# Altium PCB ESP_Infidel_PCB.PcbDoc
Units mm, origin at the board's own origin, x right, y up, seen from the top; angles counter-clockwise.
Board outline 50 x 20 mm, 4 copper layers (Top Layer, Layer 1, Layer 2, Bottom Layer), stack 1.561 mm thick; 47 components, 24 nets, 155 pads, 44 vias.
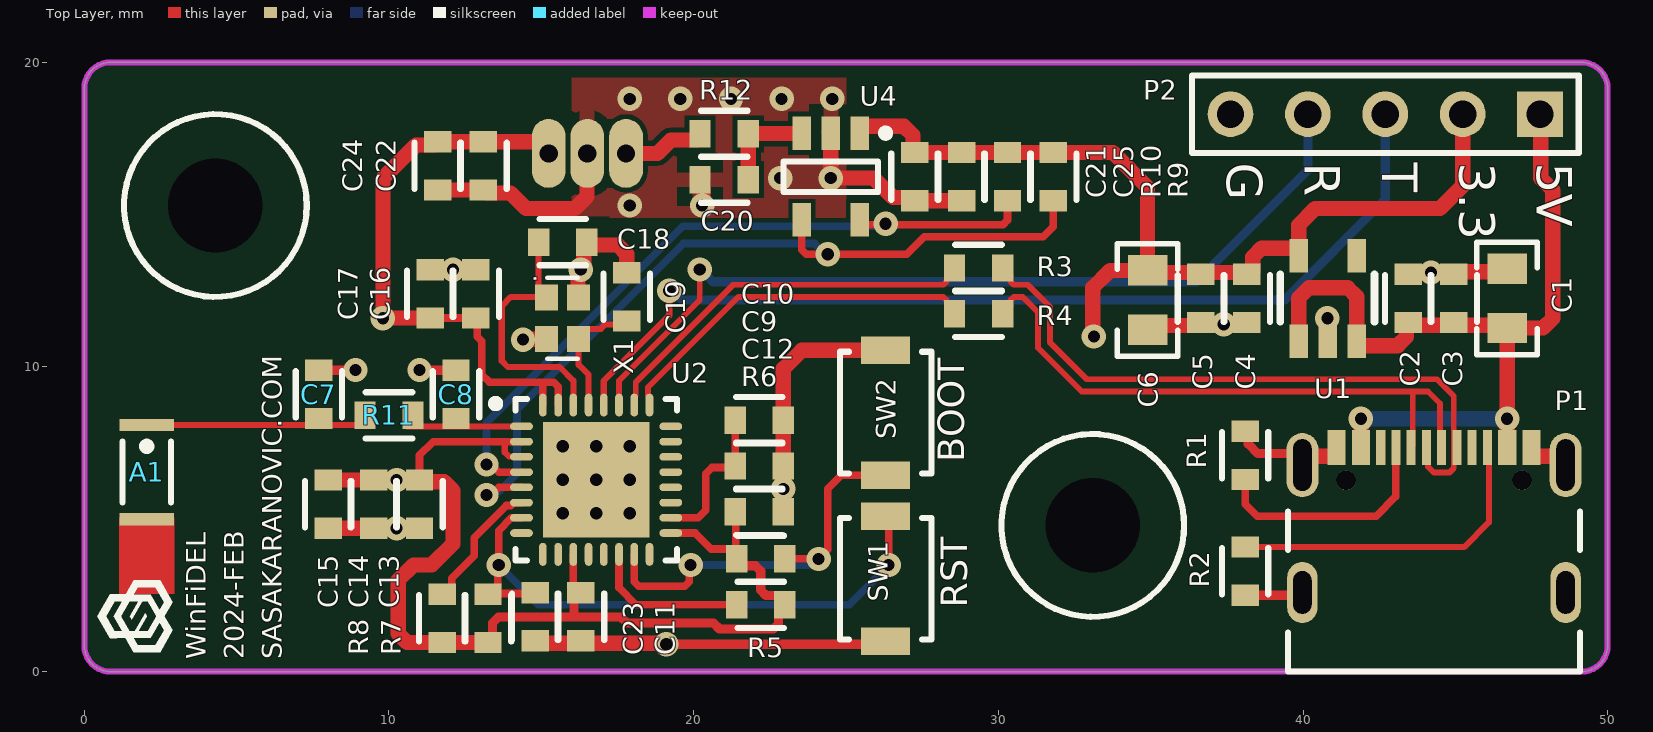
[diagram p0: Top Layer view]
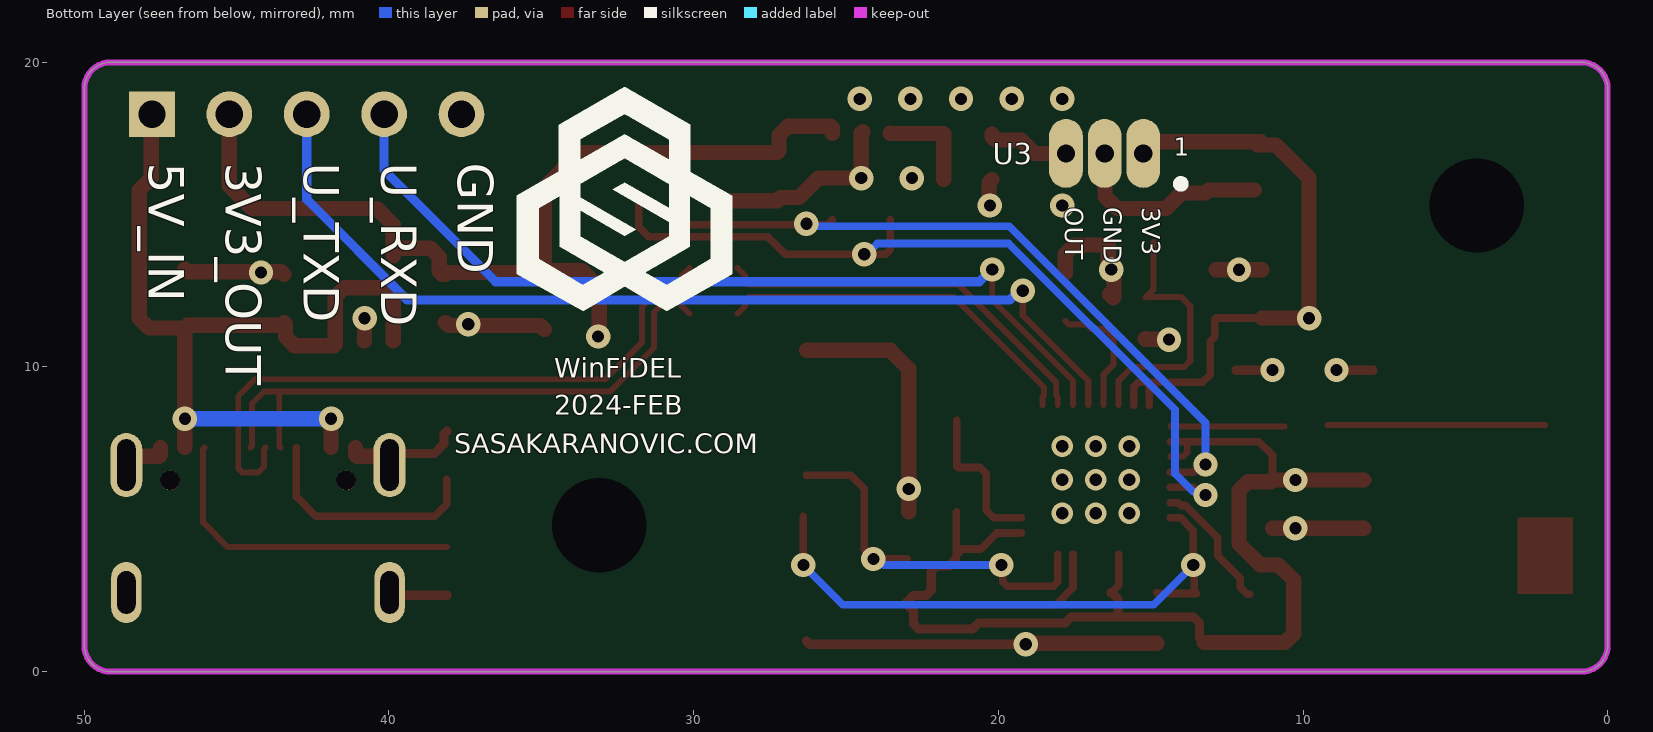
[diagram p1: Bottom Layer view, seen from below]
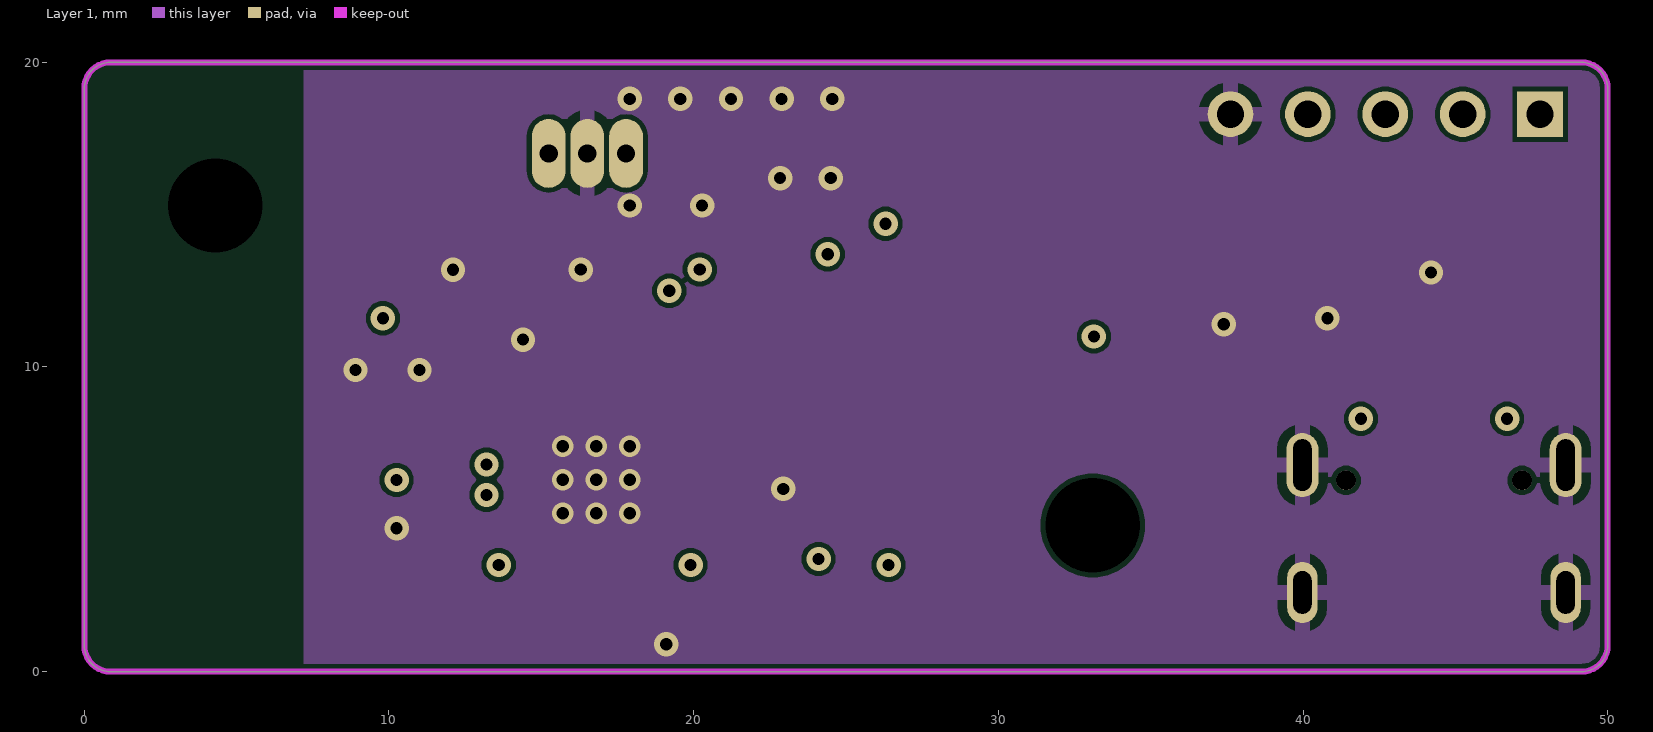
[diagram p2: Layer 1]
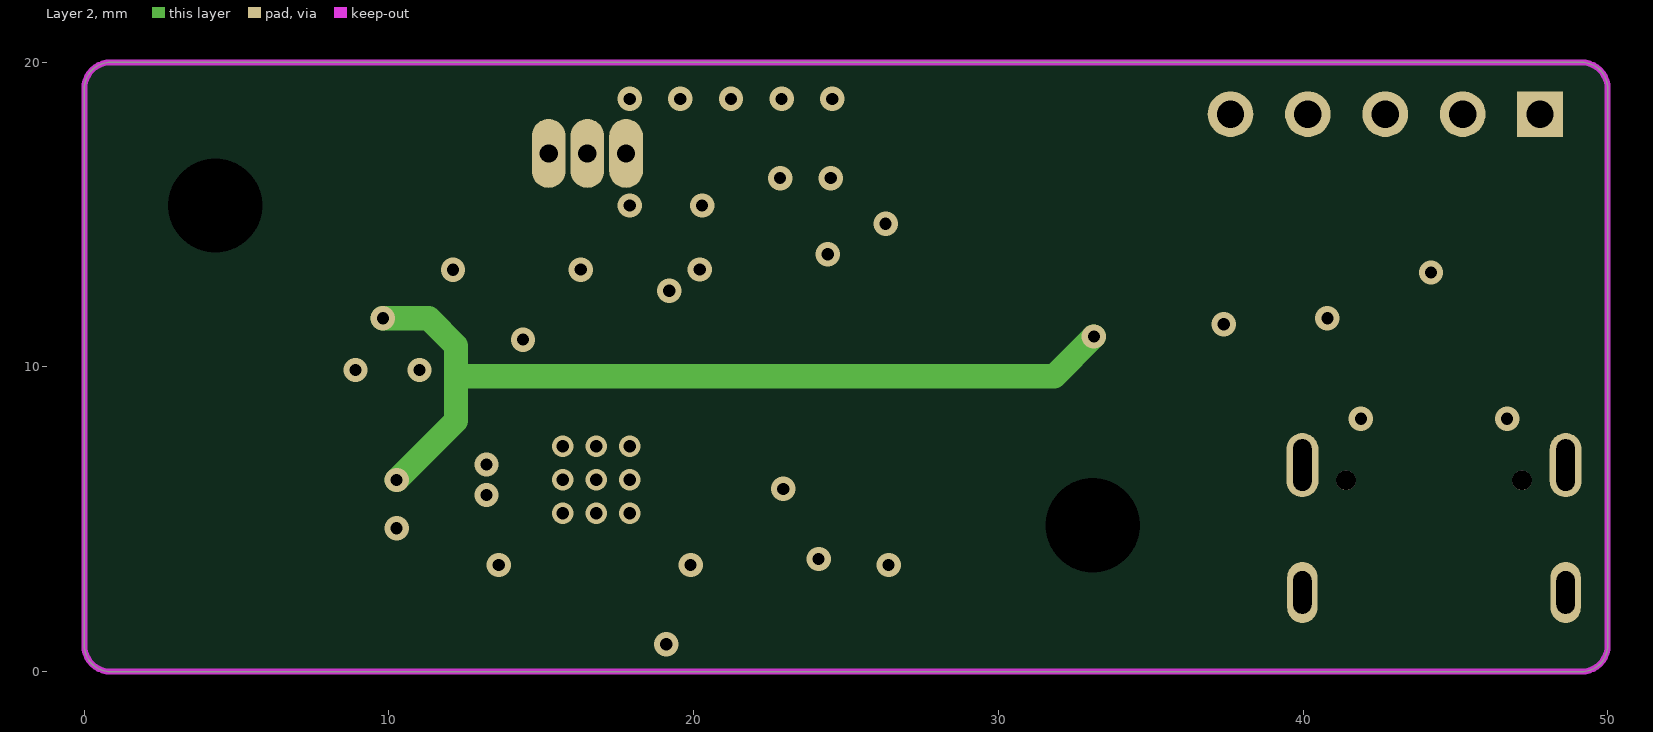
[diagram p3: Layer 2]
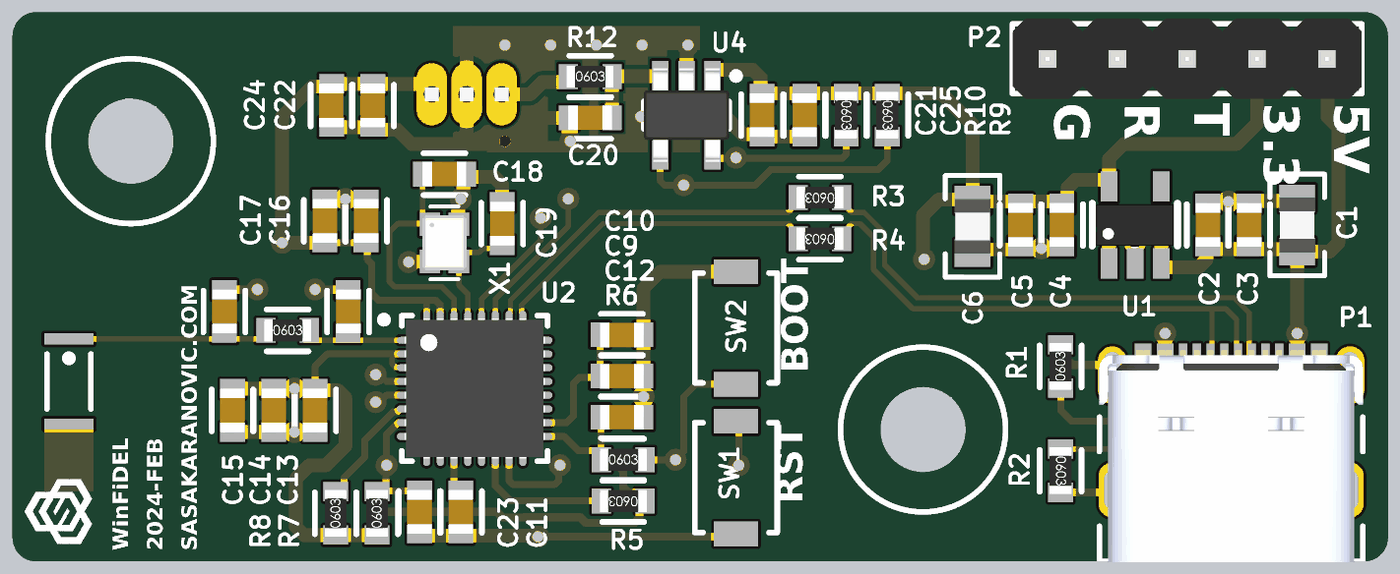
[diagram p4: 3D render of the assembled board from above, using the file's embedded part models]

## Layer stack, top to bottom
Top Solder: solder mask 0.0102, Solder Resist, Dk 3.5
Top Layer: signal copper 0.0356
Dielectric 2: prepreg 0.11, PP-006, Dk 4.1
Layer 1: signal copper 0.035
Dielectric 1: dielectric 1.2, FR-4, Dk 4.8
Layer 2: signal copper 0.035
Dielectric 3: prepreg 0.11, PP-006, Dk 4.1
Bottom Layer: signal copper 0.0356
Bottom Solder: solder mask 0.0102, Solder Resist, Dk 3.5

## Board outline
0.86,0 cw(c0.86,0.86) 0,0.86 0,19.14 cw(c0.86,19.14) 0.86,20 49.14,20 cw(c49.14,19.14) 50,19.14 50,0.86 cw(c49.14,0.86) 49.14,0

## Design rules (kind name [scope] priority, off if disabled: settings)
Clearance RF_Poly [All vs InNetClass('RF')] p1: gap=0.19 ignorepadtopadclearanceinfootprint=FALSE
Clearance [All] p2: gap=0.152 ignorepadtopadclearanceinfootprint=FALSE
DiffPairsRouting [All] p1: maxlimit=0.21 minlimit=0.127 mostfreqgap=0.21 toplayer_mingap=0.21 toplayer_minwidth=0.191 toplayer_maxwidth=0.191 toplayer_prefwidth=0.191 midlayer1_maxgap=0.127 midlayer1_prefgap=0.127 midlayer1_minwidth=0.08 midlayer1_maxwidth=0.08 midlayer1_prefwidth=0.08 midlayer2_maxgap=0.127 midlayer2_prefgap=0.127 midlayer2_minwidth=0.08 midlayer2_maxwidth=0.08 midlayer2_prefwidth=0.08 bottomlayer_mingap=0.21 bottomlayer_minwidth=0.191 bottomlayer_maxwidth=0.191 bottomlayer_prefwidth=0.191 impedanceprofiledriven=TRUE impedanceprofileid={A8B91CB2-8251-40B6-85BE-8A28E7F6A7C3} impedanceprofilevalue=90.000000 maxuncoupledlength=12.7
HoleSize [All] p1: absolutevalues=TRUE maxlimit=50 minlimit=0.4 maxpercent=80.000 minpercent=20.000
MinimumSolderMaskSliver [All] p1 off: minsoldermaskwidth=0.1
PlaneClearance RF_Clearance [InNetClass('RF')] p1: clearance=0.19
PlaneClearance [All] p2: clearance=0.508
PlaneConnect [All] p1: pad.planeconnectstyle=Relief pad.reliefexpansion=0.508 pad.reliefentries=4 pad.reliefconductorwidth=3 pad.reliefairgap=0.2 via.planeconnectstyle=Direct via.reliefexpansion=0.508 via.reliefentries=4 via.reliefconductorwidth=0.254 via.reliefairgap=0.254
PolygonConnect PolygonConnect_2 [All vs IsNamedPolygon('GND_L01_P006')] p1: connectstyle=Direct reliefconductorwidth=0.254 reliefentries=4 polygonreliefangle="90 Angle" airgapwidth=0.254
PolygonConnect PolygonConnect_1 [All vs IsNamedPolygon('12V_L01_P005')] p2: connectstyle=Direct reliefconductorwidth=0.254 reliefentries=4 polygonreliefangle="90 Angle" airgapwidth=0.254
PolygonConnect GND_POLY [All vs InNamedPolygon('GND_POLY')] p3: thpad.connectstyle=Relief thpad.reliefconductorwidth=3 thpad.reliefentries=4 thpad.polygonreliefangle="90 Angle" thpad.airgapwidth=0.2 smdpad.connectstyle=Relief smdpad.reliefconductorwidth=0.254 smdpad.reliefentries=4 smdpad.polygonreliefangle="90 Angle" smdpad.airgapwidth=0.254 via.connectstyle=Direct via.reliefconductorwidth=0.254 via.reliefentries=4 via.polygonreliefangle="90 Angle" via.airgapwidth=0.254
PolygonConnect FET_GND [All vs InNamedPolygon('FET_GND')] p4: thpad.connectstyle=Relief thpad.reliefconductorwidth=0.254 thpad.reliefentries=4 thpad.polygonreliefangle="90 Angle" thpad.airgapwidth=0.254 smdpad.connectstyle=Relief smdpad.reliefconductorwidth=0.4 smdpad.reliefentries=4 smdpad.polygonreliefangle="90 Angle" smdpad.airgapwidth=0.15 via.connectstyle=Direct via.reliefconductorwidth=0.254 via.reliefentries=4 via.polygonreliefangle="90 Angle" via.airgapwidth=0.254
PolygonConnect RF-Poly [All vs InNetClass('RF')] p5: connectstyle=Relief reliefconductorwidth=0.3 reliefentries=4 polygonreliefangle="90 Angle" airgapwidth=0.2
PolygonConnect [All] p6: thpad.connectstyle=Relief thpad.reliefconductorwidth=0.5 thpad.reliefentries=4 thpad.polygonreliefangle="90 Angle" thpad.airgapwidth=0.3 smdpad.connectstyle=Relief smdpad.reliefconductorwidth=0.5 smdpad.reliefentries=4 smdpad.polygonreliefangle="90 Angle" smdpad.airgapwidth=0.4 via.connectstyle=Direct via.reliefconductorwidth=0.254 via.reliefentries=4 via.polygonreliefangle="90 Angle" via.airgapwidth=0.254
RoutingVias [All] p1: holewidth=0.4 width=0.8 viastyle="Through Hole" minholewidth=0.3 minwidth=0.6 maxholewidth=2 maxwidth=50
SilkToSilkClearance [All] p1 off: silktosilkclearance=0.1
SilkToSolderMaskClearance [IsPad] p1 off: minsilkscreentomaskgap=0.1 clearancetoexposedcopper=TRUE
SolderMaskExpansion [All] p1: expansion=0.102 istentingtop=FALSE
Width [All] p1: maxlimit=50 minlimit=0.154 preferedwidth=0.2
23 further rules are at their usual default settings.

## Classes and differential pairs
net class RF: NetA1_1 NetC8_2
differential pair USB_IN: +USB_IN_P -USB_IN_N
differential pair USB: +USB_P -USB_N

## Components (designator, comment, footprint, x,y, rotation, side; value= is the part's Value field where it differs from the comment)
A1 "ANT3216LL00R2400A" ANT3216LL00R2400A 2.05,6.55 r270 top locked
C1 "Cap" 0805 46.7,12.25 r270 top value=22uF
C2 "Cap" "0603 - CAP" 43.45,12.25 r270 top value=10uF
C3 "Cap" "0603 - CAP" 44.95,12.25 r270 top value=100n
C4 "Cap" "0603 - CAP" 38.15,12.25 r90 top value=100n
C5 "Cap" "0603 - CAP" 36.65,12.25 r90 top value=10uF
C6 "Cap" 0805 34.9,12.2 r90 top value=22uF
C7 "Cap" "0603 - CAP" 7.7,9.1 r270 top value=DNP
C8 "Cap" "0603 - CAP" 12.2,9.1 r270 top value=DNP
C9 "Cap" "0603 - CAP" 22.15,6.75 r180 top value=1u
C10 "Cap" "0603 - CAP" 22.15,8.25 r180 top value=1u
C11 "Cap" "0603 - CAP" 16.3,1.8 r90 top value=100n
C12 "Cap" "0603 - CAP" 22.15,5.25 r180 top value=1u
C13 "Cap" "0603 - CAP" 11,5.5 r90 top value=100n
C14 "Cap" "0603 - CAP" 9.5,5.5 r90 top value=1u
C15 "Cap" "0603 - CAP" 8,5.5 r90 top value=10uF
C16 "Cap" "0603 - CAP" 12.85,12.4 r270 top value=100n
C17 "Cap" "0603 - CAP" 11.35,12.4 r270 top value=1u
C18 "Cap" "0603 - CAP" 15.7,14.1 r0 top value=8pF
C19 "Cap" "0603 - CAP" 17.8,12.3 r270 top value=8pF
C20 "Cap" "0603 - CAP" 21,16.15 r0 top value=100n
C21 "Cap" "0603 - CAP" 27.25,16.25 r90 top value=100n
C22 "Cap" "0603 - CAP" 13.1,16.6 r90 top value=100n
C23 "Cap" "0603 - CAP" 14.8,1.8 r90 top value=100n
C24 "Cap" "0603 - CAP" 11.6,16.6 r90 top value=10uF
C25 "Cap" "0603 - CAP" 28.8,16.25 r90 top value=10uF
P1 "USB-C Recepticle" GCT_USB4105-GF-A 44.3,2.6 r0 top
P2 "Header 5" "Header 5x1" 47.78,18.3 r180 top
R1 "Res" 0603 38.1,7.1 r90 top value=5.1K
R2 "Res" 0603 38.1,3.3 r270 top value=5.1K
R3 "Res" 0603 29.35,13.25 r180 top value=27R
R4 "Res" 0603 29.35,11.75 r180 top value=27R
R5 "Res" 0603 22.2,2.2 r180 top value=5.1K
R6 "Res" 0603 22.2,3.7 r0 top value=5.1K
R7 "Res" 0603 13.25,1.75 r90 top value=5.1K
R8 "Res" 0603 11.75,1.75 r90 top value=5.1K
R9 "Res" 0603 31.8,16.25 r270 top value=2K2
R10 "Res" 0603 30.3,16.25 r270 top value=2K2
R11 "Res" 0603 10,8.41 r0 top value=0R
R12 "Res" 0603 21,17.65 r0 top value=2K2
SW1 "Switch" Switch-XDTD-0304-215 26.3,3.05 r270 top
SW2 "Switch" Switch-XDTD-0304-215 26.3,8.5 r90 top
U1 "IC REG LINEAR 3.3V 300MA SOT23-5" SOT-23-5 40.8,12.25 r90 top
U2 "ESP32-C3-FNH4" QFN50P500X500X100_HS-33N 16.8,6.3 r0 top
U3 "DRV5055A2QLPGM" SS490A 16.51,17.01 r0 bottom locked
U4 "MCP3221A5T-E/OT" SOT95P270X145-5N 24.5,16.25 r270 top
X1 "40MHz" XTAL-4LEAD-2016 15.7,11.6 r270 top

## Footprints (in the part's own frame and the unit in brackets; to place one, negate y for a bottom-side part, rotate by r counter-clockwise, add the part's x,y. Pads: shape width x height; smd on the part's side, far side on the other; paste and mask are expansions set on the pad)
0603 [mm]
  rect 0.7x0.9 smd: 1(-0.79,0) 2(0.79,0)
  silkscreen extent -0.76,-0.76 0.76,0.76, body extent -0.85,-0.4 0.85,0.4, height 0.56
"0603 - CAP" [mm]
  rect 0.7x0.9 smd: 1(-0.79,0) 2(0.79,0)
  silkscreen extent -0.76,-0.76 0.76,0.76, body extent -0.8,-0.44 0.8,0.46, height 0.8
0805 [mm]
  rect 1x1.3 smd: 1(-0.97,0) 2(0.97,0)
  silkscreen extent -1.85,-0.99 1.85,0.99, body extent -1,-0.65 1,0.66, height 0.73
ANT3216LL00R2400A [mm]
  rect 0.4x1.8 smd: 1(-1.55,0) 2(1.55,0)
  silkscreen extent -1,-0.8 1,0.8, body extent -1.6,-0.8 1.6,0.8, height 1.21
GCT_USB4105-GF-A [mm]
  oval 1x2 hole 0.6 slot 1.4 at 90 deg paste+0: 15(-4.32,0) 17(4.32,0)
  oval 1.05x2.1 hole 0.6 slot 1.7 at 90 deg paste+0: 16(-4.32,4.18) 18(4.32,4.18)
  rect 0.6x1.15 smd: A1/B12(-3.2,4.755) A4/B9(-2.4,4.755) B1/A12(3.2,4.755) B4/A9(2.4,4.755)
  rect 0.3x1.15 smd: A5(-1.25,4.755) A6(-0.25,4.755) A7(0.25,4.755) A8(1.25,4.755) B5(1.75,4.755) B6(0.75,4.755) B7(-0.75,4.755) B8(-1.75,4.755)
  round 0.65 hole 0.65 unplated: ""(-2.89,3.68) ""(2.89,3.68)
  silkscreen extent -4.79,-2.6 4.79,2.65, body extent -4.79,-2.63 4.79,5.08, height 3.31
"Header 5x1" [mm] "Connector; Header; 5 Position"
  rect 1.5x1.5 hole 0.9: 1(0,0)
  round 1.5 hole 0.9: 2(2.54,0) 3(5.08,0) 4(7.62,0) 5(10.16,0)
  silkscreen extent -1.27,-1.27 11.43,1.27, body extent -1.27,-1.46 11.43,1.46, height 8.51
QFN50P500X500X100_HS-33N [mm] "QFN, 32-Leads, Body 5.00x5.00mm, Pitch 0.50mm, Thermal Pad 3.50x3.80mm, IPC Medium Density"
  oval 0.75x0.25 smd: 1(-2.45,1.75) 2(-2.45,1.25) 3(-2.45,0.75) 4(-2.45,0.25) 5(-2.45,-0.25) 6(-2.45,-0.75) 7(-2.45,-1.25) 8(-2.45,-1.75) 17(2.45,-1.75) 18(2.45,-1.25) 19(2.45,-0.75) 20(2.45,-0.25) 21(2.45,0.25) 22(2.45,0.75) 23(2.45,1.25) 24(2.45,1.75)
  oval 0.25x0.75 smd: 9(-1.75,-2.45) 10(-1.25,-2.45) 11(-0.75,-2.45) 12(-0.25,-2.45) 13(0.25,-2.45) 14(0.75,-2.45) 15(1.25,-2.45) 16(1.75,-2.45) 25(1.75,2.45) 26(1.25,2.45) 27(0.75,2.45) 28(0.25,2.45) 29(-0.25,2.45) 30(-0.75,2.45) 31(-1.25,2.45) 32(-1.75,2.45)
  rect 3.5x3.8 smd: 33(0,0)
  silkscreen extent -3.42,-2.65 2.65,2.65, body extent -2.55,-2.55 2.55,2.55, height 1
SOT95P270X145-5N [mm] "SOT23, 5-Leads, Body 2.90x2.70mm, Pitch 0.95mm, IPC Medium Density"
  rect 1.1x0.6 smd: 1(-1.425,0.95) 2(-1.425,0) 3(-1.425,-0.95) 4(1.425,-0.95) 5(1.425,0.95)
  silkscreen extent -1.55,-1.55 0.5,1.93, body extent -1.7,-1.55 1.7,1.55, height 1.45
SOT-23-5 [mm]
  rect 1.1x0.6 smd: 1(-1.4,0.94) 2(-1.4,-0.01) 3(-1.4,-0.96) 4(1.4,-0.96) 5(1.4,0.94)
  silkscreen extent -0.76,-1.55 0.79,1.55, body extent -1.4,-1.45 1.4,1.45
SS490A [mm]
  oval 1.108x2.26 hole 0.6: 1(-1.27,0) 2(0,0) 3(1.27,0)
  silkscreen extent -2.6,0.9 -2.39,1.1, body extent -2.5,-1.2 2.5,2.5, height 15.52
Switch-XDTD-0304-215 [mm]
  rect 0.9x1.6 smd: 1(-2.05,0) 2(2.05,0)
  silkscreen extent -2,-1.5 2,1.5, body extent -2,-1.5 2,1.5, height 1.5
XTAL-4LEAD-2016 [mm]
  rect 0.85x0.75 smd: 1(-0.675,-0.525) 2(0.675,-0.525) 3(0.675,0.525) 4(-0.675,0.525)
  silkscreen extent -1.33,-0.5 1.33,0.5, body extent -1,-0.8 1,0.8, height 0.7

## Part data
A1: "RF ANT 2.45GHZ CHIP SOLDER SMD", Manufacturer=YAGEO, Distributor=LCSC, Distributor Part Number=ANT3216LL00R2400A, Manufacturer Part Number=ANT3216LL00R2400A
C1 C6: "Capacitor", Distributor Part Number=C602037, Manufacturer="Samsung Electro-Mechanics", Manufacturer Part Number=CL21A226MAYNNNE, Voltage=25V, Distributor=LCSC
C2 C5 C15 C24 C25: "Capacitor", Distributor Part Number=C15850, Manufacturer="Samsung Electro-Mechanics", Manufacturer Part Number=CL21A106KAYNNNE, Voltage=25V, Distributor=LCSC
C3 C4 C11 C13 C16 C20 C21 C22 C23: "Capacitor", Distributor Part Number=C1591, Manufacturer="Samsung Electro-Mechanics", Manufacturer Part Number=CL10B104KB8NNNC, Temp Rating=X7R, Voltage=50V, Distributor=LCSC
C7 C8: "Capacitor"
C9 C10 C12 C14 C17: "Capacitor", Distributor Part Number=C559769, Manufacturer=YAGEO, Manufacturer Part Number=CC0603KRX7R9BB105, Temp Rating=X7R, Voltage=50V, Distributor=LCSC
C18 C19: "Capacitor", Distributor Part Number=C327316, Manufacturer=YAGEO, Manufacturer Part Number=CC0603CRNPO9BN8R0, Temp Rating=NP0, Voltage=50V, Distributor=LCSC
P1: library part "USB-C Recepticle -USB-TYPE-C-019", "3A 1 Surface Mount 16P Female -25℃~+85℃ Type-C SMD USB Connectors ROHS", Distributor Part Number=C2927039, Manufacturer=DEALON, Manufacturer Part Number=USB-TYPE-C-019, Distributor=LCSC
P2: "Header, 5-Pin"
R1 R2 R5 R6 R7 R8: "Resistor", Distributor Part Number=C105580, Manufacturer=YAGEO, Manufacturer Part Number=RC0603FR-075K1L, Power Rating=100mW, Tolerance=1%, Distributor=LCSC
R3 R4: "Resistor", Distributor Part Number=C137753, Manufacturer=YAGEO, Manufacturer Part Number=RC0603FR-0727RL, Power Rating=100mW, Tolerance=1%, Distributor=LCSC
R9 R10 R12: "Resistor", Distributor Part Number=C125931, Manufacturer=YAGEO, Manufacturer Part Number=AC0603FR-072K2L, Power Rating=100mW, Tolerance=1%, Distributor=LCSC
R11: "Resistor", Distributor Part Number=C95177, Manufacturer=YAGEO, Manufacturer Part Number=RC0603JR-070RL, Power Rating=100mW, Tolerance=5%, Distributor=LCSC
SW1 SW2: library part "Switch -XDTD-0304-215", "50mA Surface Mount SPST 100MΩ 100,000 Times 12V 160gf@±50gf SMD Tactile Switches ROHS", Distributor Part Number=C7498203, Manufacturer="Lian Xin Technology", Manufacturer Part Number=XDTD-0304-215, Distributor=LCSC
U1: library part AP7366-33W5-7, "600mA null 3.3V positive 6V SOT-25 Linear Voltage Regulators (LDO) ROHS", Distributor Part Number=C526385, Manufacturer="Diodes Incorporated", Distributor=LCSC, Manufacturer Part Number=AP7366-33W5-7
U2: "Ultra-Low-Power SoC with RISC-V Single-Core CPU 2.4 GHz Wi-Fi (802.11 b/g/n) and Bluetooth® 5 (LE)", Distributor Part Number=C2858491, Manufacturer="Espressif Systems", Manufacturer Part Number=ESP32-C3FH4, Distributor=LCSC
U3: "Hall Effect Sensor Single Axis Radial Lead", Distributor Part Number=C266129, Manufacturer="Texas Instruments", Distributor=LCSC, Manufacturer Part Number=DRV5055A2QLPGM
U4: library part MCP3021A5T-E/OT, "10 Bit Analog to Digital Converter 1 Input 1 SAR SOT-23-5", Distributor Part Number=C625475, Manufacturer="Microchip Technology", Distributor=LCSC, Manufacturer Part Number=MCP3221A5T-E/OT
X1: library part XTAL-40MHz-R940000171, "40MHz 9pF ±10ppm SMD2016-4P Crystals ROHS", Distributor Part Number=C2929402, Manufacturer=TROQ, Manufacturer Part Number=R940000171, Distributor=LCSC

## Free pads (board coordinates)
  round 0 hole 3.1 unplated: ""(4.3,15.3) ""(33.1,4.8)

## Via types
v1: diameter 0.8, hole 0.4, Top Layer to Bottom Layer, tented both sides, 35 vias
v2: diameter 0.7, hole 0.4, Top Layer to Bottom Layer, tented bottom, 9 vias

## Nets (pads, with @x,y where several pads share a name; then routed paths per layer and width w, separated by ;. In a path a pad name is that pad's centre, name@x,y a point inside that pad or via, vN(x,y) a via of type N, cw(c..) or ccw(c..) an arc to the next point about the centre after c; other vN are vias at no path point)
3V3: C4.2 C5.2 C6.2 C11.2 C12.2 C13.2 C14.2 C15.2 C16.2 C17.2 C21.2 C22.2 C24.2 C25.2 P2.2 R5.1 R6.1 R7.1 R8.1 R9.1 R10.1 U1.5 U2.2 U2.3 U2.11 U2.17 U2.31 U2.32 U3.1 U4.1 | length 119.1
  Top Layer w0.2: 13.8,7.5 13.8,7.2 13.94,7.06 14.34,7.06 U2.3
  Top Layer w0.25: C13.2 11,7.1 11.45,7.55 U2.2 ; C17.2 C16.2 12.9,11.56 12.9,11 13.05,10.85 13.05,9.75 13.3,9.5 15.1,9.5 ; U2.32 15.05,9.45 15.1,9.5 ; U2.31 15.55,9.354 15.404,9.5 15.1,9.5 ; U2.11 16.05,2.84 C11.2 ; U2.17 20.05,4.55 20.575,4.025 21.185,4.025 21.385,3.825 21.385,5.225 C12.2
  Top Layer w0.3: R7.1 13.4,1.11 13.4,1.6 13.6,1.8 17.6,1.8 17.8,1.6 18.594,1.6 18.597,1.602 20.647,1.602 20.85,1.4 22.614,1.4 22.79,1.576 22.79,2 R5.1 22.99,2.3 22.79,2.5 22.376,2.5 22.2,2.676 22.2,3.302 22.024,3.478 21.61,3.478 21.41,3.678 R6.1 ; 16.078,1.976 16.078,2.39 16.278,2.59 C11.2
  Top Layer w0.5: C15.2 C14.2 v1(10.25,6.29) C13.2 11.054,6.236 11.806,6.236 12.099,5.943 12.099,4.199 11.4,3.5 10.8,3.5 10.3,3 10.3,1.253 10.593,0.96 R8.1 R7.1 ; C17.2 11.345,11.605 9.805,11.605 v1(9.8,11.6) 9.8,16.2 10.89,17.29 11.5,17.29 C24.2 ; C24.2@11.39,17.39 C22.2 U3.1@14.959,17.39 ; U4.1 25.45,17.85 25.5,17.9 26.907,17.9 27.2,17.607 27.2,17.09 C21.2 33.76,17.04 34.9,15.9 C6.2 ; v1@33.1,11 33.1,12.6 33.67,13.17 C6.2 ; U1.5 U1.5@39.86,13.85 ; P2.2 45.24,15.94 44.5,15.2 40.4,15.2 39.86,14.66 U1.5@39.86,13.85 ; C6.2 34.965,13.105 38.085,13.105 C4.2 38.25,13.04 38.35,13.14 38.35,13.607 38.643,13.9 39.81,13.9 U1.5@39.86,13.85
  Layer 2 w0.8: v1(9.8,11.6) 11.3,11.6 12.2,10.7 12.2,9.7 ; v1(10.25,6.29) 12.2,8.24 12.2,9.7 ; v1(33.138,11) 31.838,9.7 12.2,9.7
5V_IN: C1.2 C2.2 C3.2 P1.A4/B9 P1.B4/A9 P2.1 U1.1 U1.3 | length 28.9
  Top Layer w0.5: U1.1 39.86,12.26 40.2,12.6 41.467,12.6 41.76,12.307 U1.3 41.76,10.75 41.81,10.7 43.107,10.7 43.4,10.993 43.4,11.41 C2.2 43.54,11.37 46.61,11.37 C1.2 ; P1.A4/B9 v1(41.9,8.3) ; P1.B4/A9 v1(46.7,8.3) C1.2 ; P2.1 47.8,18.28 47.8,16.2 48.2,15.8 48.2,11.6 47.88,11.28 C1.2
  Bottom Layer w0.5: v1(41.9,8.3) v1(46.7,8.3)
BOOT: R6.2 SW2.1 U2.15 | length 13.3
  Top Layer w0.25: U2.15 18.05,2.946 18.196,2.8 19.711,2.8 19.858,2.946 19.858,3.458 v1(19.9,3.5) ; R6.2 v1(24.1,3.7) 24.4,4 24.4,6 24.85,6.45 SW2.1
  Bottom Layer w0.25: v1(19.9,3.5) 23.751,3.5 23.951,3.7 v1(24.1,3.7)
CHIP_EN: C23.2 R7.2 SW1.1 U2.7 | length 19.8
  Top Layer w0.25: U2.7 14.019,5.05 13.6,4.631 v1(13.6,3.5) 13.575,3.475 13.575,2.64 13.5,2.565 14.775,2.565 C23.2 ; v1(26.4,3.5) SW1.1@26.4,5.1
  Bottom Layer w0.25: v1(13.6,3.5) 14.9,2.2 25.1,2.2 v1(26.4,3.5)
GND: C1.1 C2.1 C3.1 C4.1 C5.1 C6.1 C7.1 C8.1 C9.1 C10.1 C11.1 C12.1 C13.1 C14.1 C15.1 C16.1 C17.1 C18.2 C19.1 C20.1 C21.1 C22.1 C23.1 C24.1 C25.1 P1.15 P1.16 P1.17 P1.18 P1.A1/B12 P1.B1/A12 P2.5 R1.2 R2.2 SW1.2 SW2.2 U1.2 U2.33 U3.2 U4.2 X1.2 X1.4 | length 60.7
  Top Layer w0.3: C7.1 7.705,9.895 8.895,9.895 v1(8.9,9.9) ; v1(11,9.9) 11.005,9.895 12.195,9.895 C8.1 ; v1@18.9,0.9 26.2,0.9 SW1.2 ; R2.2 39.89,2.51 P1.15 ; R1.2 38.2,7.79 38.2,7.476 38.521,7.155 39.877,7.155 P1.16@40.017,7.294
  Top Layer w0.5: C15.1 C14.1 C13.1 ; C17.1 C16.1 ; C24.1 C22.1 13.2,15.71 13.99,15.71 14.5,15.2 16.1,15.2 16.5,15.6 16.5,17 U3.2 U3.2@16.626,17.126 ; v1(14.4,10.9) 14.412,10.913 15.162,10.913 X1.2 ; C23.1@14.8,0.93 19.07,0.93 v1(19.1,0.9) ; X1.4@16.34,12.39 X1.4 16.2,12.3 16.2,13.1 16.39,13.29 16.39,14 17.507,14 17.8,13.707 C19.1 ; C20.1 20.31,16.05 20.31,15.293 v1@20.277,15.26 ; C12.1 C9.1 C10.1 22.94,9.94 23.55,10.55 SW2.2 ; U4.2@24.45,17.725 U4.2 v1(24.5,16.2) 25.9,16.2 26.54,15.56 27.15,15.56 C21.1 C25.1 ; C6.1 35.03,11.36 38.05,11.36 C4.1 ; P1.16 39.98,6.813 40.234,7.067 41.05,7.067 41.1,7.117 P1.A1/B12 ; v1(40.8,11.6) 40.8,10.86 U1.2 ; C2.1 43.54,13.13 46.61,13.13 C1.1 ; P1.B1/A12 47.5,7.117 47.55,7.067 48.366,7.067 48.62,6.813 P1.18
  other v1: 10.25,4.71 22.94,6 37.4,11.4 44.2,13.1 12.1,13.19 16.295,13.195 17.9,15.3 20.277,15.3 22.838,16.2 17.9,18.8 19.562,18.8 21.225,18.8 22.887,18.8 24.55,18.8
  other v2: 15.7,5.2 16.8,5.2 17.9,5.2 15.7,6.3 16.8,6.3 17.9,6.3 15.7,7.4 16.8,7.4 17.9,7.4
GPIO2: R8.2 U2.6 | length 4.4
  Top Layer w0.25: R8.2 11.835,2.54 12.06,2.765 12.06,3.06 12.8,3.8 12.8,4.4 13.852,5.452 14.002,5.452 14.1,5.55 U2.6
GPIO8: R5.2 U2.14 | length 5.2
  Top Layer w0.25: U2.14 17.55,2.75 18.1,2.2 R5.2
I2C_SCL: R10.2 U2.4 U4.5 | length 24
  Top Layer w0.25: v1(13.2,6.8) 13.349,6.8 13.599,6.55 U2.4 ; U4.5 25.6,14.675 30.154,14.675 30.3,14.821 R10.2
  Bottom Layer w0.25: v1(13.2,6.8) 13.2,8.174 19.648,14.623 26.223,14.623 v1(26.3,14.7)
I2C_SDA: R9.2 U2.5 U4.4 | length 27.8
  Top Layer w0.25: v1(13.2,5.8) 13.349,5.8 13.599,6.05 U2.5 ; U4.4 23.55,13.85 23.7,13.7 v1(24.4,13.7) 27,13.7 27.573,14.273 31.473,14.273 31.8,14.6 R9.2
  Bottom Layer w0.25: v1(13.2,5.8) 13.305,5.905 13.605,5.905 14.2,6.5 14.2,8.6 19.653,14.053 23.979,14.053 24.331,13.7 v1(24.4,13.7)
NetA1_1: A1.1 C7.2 R11.1 | length 7.2
  Top Layer w0.191: A1.1 R11.1@9.2,8.1
NetC8_2: C8.2 R11.2 U2.1 | length 3.8
  Top Layer w0.191: R11.2@10.6,8.05 U2.1 U2.1@14.339,8.061
NetC9_2: C9.2 C10.2 U2.18 | length 5
  Top Layer w0.25: U2.18 20.15,5.05 20.4,5.3 20.4,6.5 20.6,6.7 21.31,6.7 C9.2 C10.2
NetC18_1: C18.1 U2.30 X1.1 | length 8.7
  Top Layer w0.2: C18.1 14.91,12.54 X1.1@15.15,12.3 ; X1.1 X1.1@15.15,12.3 ; U2.30 16.05,9.55 15.6,10 13.9,10 13.7,10.2 13.7,12 14,12.3 X1.1@15.15,12.3
NetC19_2: C19.2 U2.29 X1.3 | length 4.2
  Top Layer w0.2: U2.29 16.55,9.75 16.225,10.075 X1.3 16.225,10.975 16.5,11.25 16.95,11.25 17.1,11.4 17.69,11.4 C19.2
NetC20_2: C20.2 R12.2 U4.3 | length 3.3
  Top Layer w0.5: C20.2 R12.2 21.803,17.662 23.537,17.662 U4.3
NetP1_A5: P1.A5 R1.1 | length 7.8
  Top Layer w0.25: R1.1 38.1,5.5 38.5,5.1 42.4,5.1 43.05,5.75 P1.A5
NetP1_B5: P1.B5 R2.1 | length 10.8
  Top Layer w0.2: R2.1 45.29,4.09 46.1,4.9 46.1,7.305 P1.B5
NetR12_1: R12.1 U3.3 | length 2.8
  Top Layer w0.5: U3.3 18.81,17.01 19.25,17.45 20.11,17.45 20.21,17.55 R12.1
U0_RXD: P2.4 U2.27 | length 29
  Top Layer w0.191: U2.27 17.55,9.55 20.2,12.2 v1(20.2,13.2)
  Bottom Layer w0.3: v1(20.2,13.2) 20.226,13.2 20.626,12.8 36.5,12.8 40.16,16.46 P2.4
U0_TXD: P2.3 U2.28 | length 32.4
  Top Layer w0.2: U2.28 17.05,9.542 19.2,11.692 v1(19.2,12.5)
  Bottom Layer w0.3: v1(19.2,12.5) 19.326,12.5 19.626,12.2 39.4,12.2 42.7,15.5 P2.3
USB_IN_N: P1.A7 P1.B7 R4.1 | length 20.2
  Top Layer w0.191: R4.1 30.395,12.005 30.395,12.188 30.506,12.3 30.8,12.3 31.3,11.8 31.3,10.634 32.735,9.199 43.6,9.199 ; P1.B7 43.6,7.405 43.6,9.199 ; P1.A7 44.495,7.41 44.495,8.805 44.101,9.199 43.6,9.199
USB_IN_P: P1.A6 P1.B6 R3.1 | length 21.3
  Top Layer w0.191: R3.1 30.395,12.995 30.395,12.812 30.506,12.7 30.966,12.7 31.701,11.966 31.701,10.8 32.901,9.6 44.4,9.6 44.951,9.049 44.951,7.355 44.951,6.68 44.803,6.532 44.297,6.532 44.105,6.725 44.105,7.3 P1.A6
USB_N: R4.2 U2.25 | length 12.2
  Top Layer w0.191: U2.25 18.55,9.016 18.5,9.066 18.5,9.334 21.466,12.3 28.194,12.3 28.305,12.188 28.305,12.005 R4.2
USB_P: R3.2 U2.26 | length 12.9
  Top Layer w0.191: U2.26 18.05,9.016 18.1,9.066 18.1,9.5 21.3,12.7 28.194,12.7 28.305,12.812 28.305,12.995 R3.2
pads on no net: A1.2 P1. P1.A8 P1.B8 U1.4 U2.8 U2.9 U2.10 U2.12 U2.13 U2.16 U2.19 U2.20 U2.21 U2.22 U2.23 U2.24

## Polygon pours and split planes (outlines as drawn)
GND on Top Layer "GND_L01_P002" (solid, pour order 2): 16,19.5 16,14.9 25,14.9 25,19.5
GND on Layer 1 "GND_L02_P001" (solid, pour order 1): 0.86,0 cw(c0.86,0.86) 0,0.86 0,19.14 cw(c0.86,19.14) 0.86,20 49.14,20 cw(c49.14,19.14) 50,19.14 50,0.86 cw(c49.14,0.86) 49.14,0

## Keep-outs
Keep-Out Layer:
  the board outline again, w0.2

## Other copper
Top Layer:
  region: 2.949,5.05 1.153,5.05 1.153,2.55 2.949,2.55
  text ".Layer_Name" at 43.05,-14.017 h2
Layer 1:
  text ".Layer_Name" at 43.05,-16.619 h2
Layer 2:
  text ".Layer_Name" at 43.05,-19.221 h2
Bottom Layer:
  text ".Layer_Name" at 43.05,-21.806 h2
Multi-Layer:
  pour cut-out: -1,20.7 -1,-0.3 7.2,-0.3 7.2,20.7

## Silkscreen, mask and mechanical layers (free items; w line width, h text height)
Top Overlay:
  drawing of 3 lines, arcs and shapes, not listed
  text "G" at 37.11,16.7 h2 r270
  text "R" at 39.666,16.7 h2 r270
  text "T" at 42.206,16.7 h2 r270
  text "3.3" at 44.73,16.7 h2 r270
  text "5V" at 47.286,16.7 h2 r270
  text "BOOT" at 29.181,6.87 h1.5 r90
  text "RST" at 29.281,2.1 h1.5 r90
  text "WinFiDEL" at 4.2,0.4 h1.1 r90
  text "2024-FEB" at 5.45,0.4 h1.1 r90
  text "SASAKARANOVIC.COM" at 6.7,0.4 h1.1 r90
  text ".Layer_Name" at 43.05,-11.432 h2
Bottom Overlay:
  region: 5307 vertices and 4 holes, not listed, extent 28.739,11.843 35.802,19.187
  text "1" at 14.25,16.735 h1
  text "GND" at 38.13,16.7 h2 r90
  text "U_RXD" at 40.654,16.7 h2 r90
  text "U_TXD" at 43.194,16.7 h2 r90
  text "3V3_OUT" at 45.75,16.7 h2 r90
  text "5V_IN" at 48.274,16.7 h2 r90
  text "3V3" at 15.465,15.25 h1 r90
  text "GND" at 16.735,15.25 h1 r90
  text "OUT" at 18.005,15.25 h1 r90
  text "WinFiDEL" at 34.58,9.431 h1.1
  text "2024-FEB" at 34.584,8.214 h1.1
  text "SASAKARANOVIC.COM" at 37.865,6.964 h1.1
  text ".Layer_Name" at 43.05,-24.407 h2
Top Solder:
  text ".Layer_Name" at 43.05,-8.83 h2
Bottom Solder:
  text ".Layer_Name" at 43.05,-26.729 h2
Drill Drawing:
  drawing of 362 lines, arcs and shapes, not listed
  text "Layer" at 64.542,42.202 h1.52
  text "Name" at 74.954,42.202 h1.52
  text "Material" at 98.57,42.202 h1.52
  text "Thickness" at 120.408,42.202 h1.52
  text "Constant" at 136.913,42.202 h1.52
  text "Board Layer Stack" at 151.388,42.202 h1.52
  text "Top Overlay" at 74.954,39.154 h1.52
  text "Top Solder" at 74.954,36.106 h1.52
  text "Solder Resist" at 98.57,36.106 h1.52
  text "0.010mm" at 120.408,36.106 h1.52
  text "3.5" at 136.913,36.106 h1.52
  text "1" at 64.542,33.058 h1.52
  text "Top Layer" at 74.954,33.058 h1.52
  text "0.036mm" at 120.408,33.058 h1.52
  text "Dielectric 2" at 74.954,30.01 h1.52
  text "PP-006" at 98.57,30.01 h1.52
  text "0.110mm" at 120.408,30.01 h1.52
  text "4.1" at 136.913,30.01 h1.52
  text "2" at 64.542,26.962 h1.52
  text "Layer 1" at 74.954,26.962 h1.52
  text "CF-004" at 98.57,26.962 h1.52
  text "0.035mm" at 120.408,26.962 h1.52
  text "Dielectric 1" at 74.954,23.914 h1.52
  text "FR-4" at 98.57,23.914 h1.52
  text "1.200mm" at 120.408,23.914 h1.52
  text "4.8" at 136.913,23.914 h1.52
  text "3" at 64.542,20.866 h1.52
  text "Layer 2" at 74.954,20.866 h1.52
  text "CF-004" at 98.57,20.866 h1.52
  text "0.035mm" at 120.408,20.866 h1.52
  text "Dielectric 3" at 74.954,17.818 h1.52
  text "PP-006" at 98.57,17.818 h1.52
  text "0.110mm" at 120.408,17.818 h1.52
  text "4.1" at 136.913,17.818 h1.52
  text "4" at 64.542,14.77 h1.52
  text "Bottom Layer" at 74.954,14.77 h1.52
  text "0.036mm" at 120.408,14.77 h1.52
  text "Bottom Solder" at 74.954,11.722 h1.52
  text "Solder Resist" at 98.57,11.722 h1.52
  text "0.010mm" at 120.408,11.722 h1.52
  text "3.5" at 136.913,11.722 h1.52
  text "Bottom Overlay" at 74.954,8.674 h1.52
  text "Total board thickness:" at 64.542,5.626 h1.52
  text "1.581mm" at 120.408,5.626 h1.52
  text "Symbol" at 64.692,0.744 h1.83
  text "Count" at 77.542,0.744 h1.83
  text "Hole Size" at 91.254,0.744 h1.83
  text "Plated" at 120.202,0.744 h1.83
  text "Hole Type" at 133.051,0.744 h1.83
  text "Via/Pad" at 151.689,0.744 h1.83
  text "2" at 77.542,-3.066 h1.52
  text "0.600mm (23.62mil)" at 91.254,-3.066 h1.52
  text "PTH" at 120.202,-3.066 h1.52
  text "Slot" at 133.051,-3.066 h1.52
  text "Pad" at 151.689,-3.066 h1.52
  text "2" at 77.542,-6.876 h1.52
  text "0.600mm (23.62mil)" at 91.254,-6.876 h1.52
  text "PTH" at 120.202,-6.876 h1.52
  text "Slot" at 133.051,-6.876 h1.52
  text "Pad" at 151.689,-6.876 h1.52
  text "2" at 77.542,-10.686 h1.52
  text "0.650mm (25.59mil)" at 91.254,-10.686 h1.52
  text "NPTH" at 120.202,-10.686 h1.52
  text "Round" at 133.051,-10.686 h1.52
  text "Pad" at 151.689,-10.686 h1.52
  text "2" at 77.542,-14.496 h1.52
  text "3.100mm (122.05mil)" at 91.254,-14.496 h1.52
  text "NPTH" at 120.202,-14.496 h1.52
  text "Round" at 133.051,-14.496 h1.52
  text "Pad" at 151.689,-14.496 h1.52
  text "3" at 77.542,-18.306 h1.52
  text "0.600mm (23.62mil)" at 91.254,-18.306 h1.52
  text "PTH" at 120.202,-18.306 h1.52
  text "Round" at 133.051,-18.306 h1.52
  text "Pad" at 151.689,-18.306 h1.52
  text "5" at 77.542,-22.116 h1.52
  text "0.900mm (35.43mil)" at 91.254,-22.116 h1.52
  text "PTH" at 120.202,-22.116 h1.52
  text "Round" at 133.051,-22.116 h1.52
  text "Pad" at 151.689,-22.116 h1.52
  text "44" at 77.542,-25.926 h1.52
  text "0.400mm (15.75mil)" at 91.254,-25.926 h1.52
  text "PTH" at 120.202,-25.926 h1.52
  text "Round" at 133.051,-25.926 h1.52
  text "Via" at 151.689,-25.926 h1.52
  text ".Layer_Name" at 43.05,-29.314 h2
  text "60 Total" at 77.542,-29.736 h1.52
  text "Slot definitions :" at 64.692,-33.418 h1.52
  text "Routed Path Length" at 90.923,-33.418 h1.52
  text "= Calculated from tool start centre position to tool end centre position." at 118.93,-33.418 h1.52
  text "Hole Length" at 90.923,-35.958 h1.52
  text "= Routed Path Length + Tool Size = Slot length as defined in the PCB layout" at 108.52,-35.958 h1.52

## Text inside footprints (layer, text, board x,y; h text height)
P1: Mechanical 13 "PCB EDGE" at 49.507,0.187 h0.41